# EAGLE board picoKey_230404 (EAGLE 9.6.2)
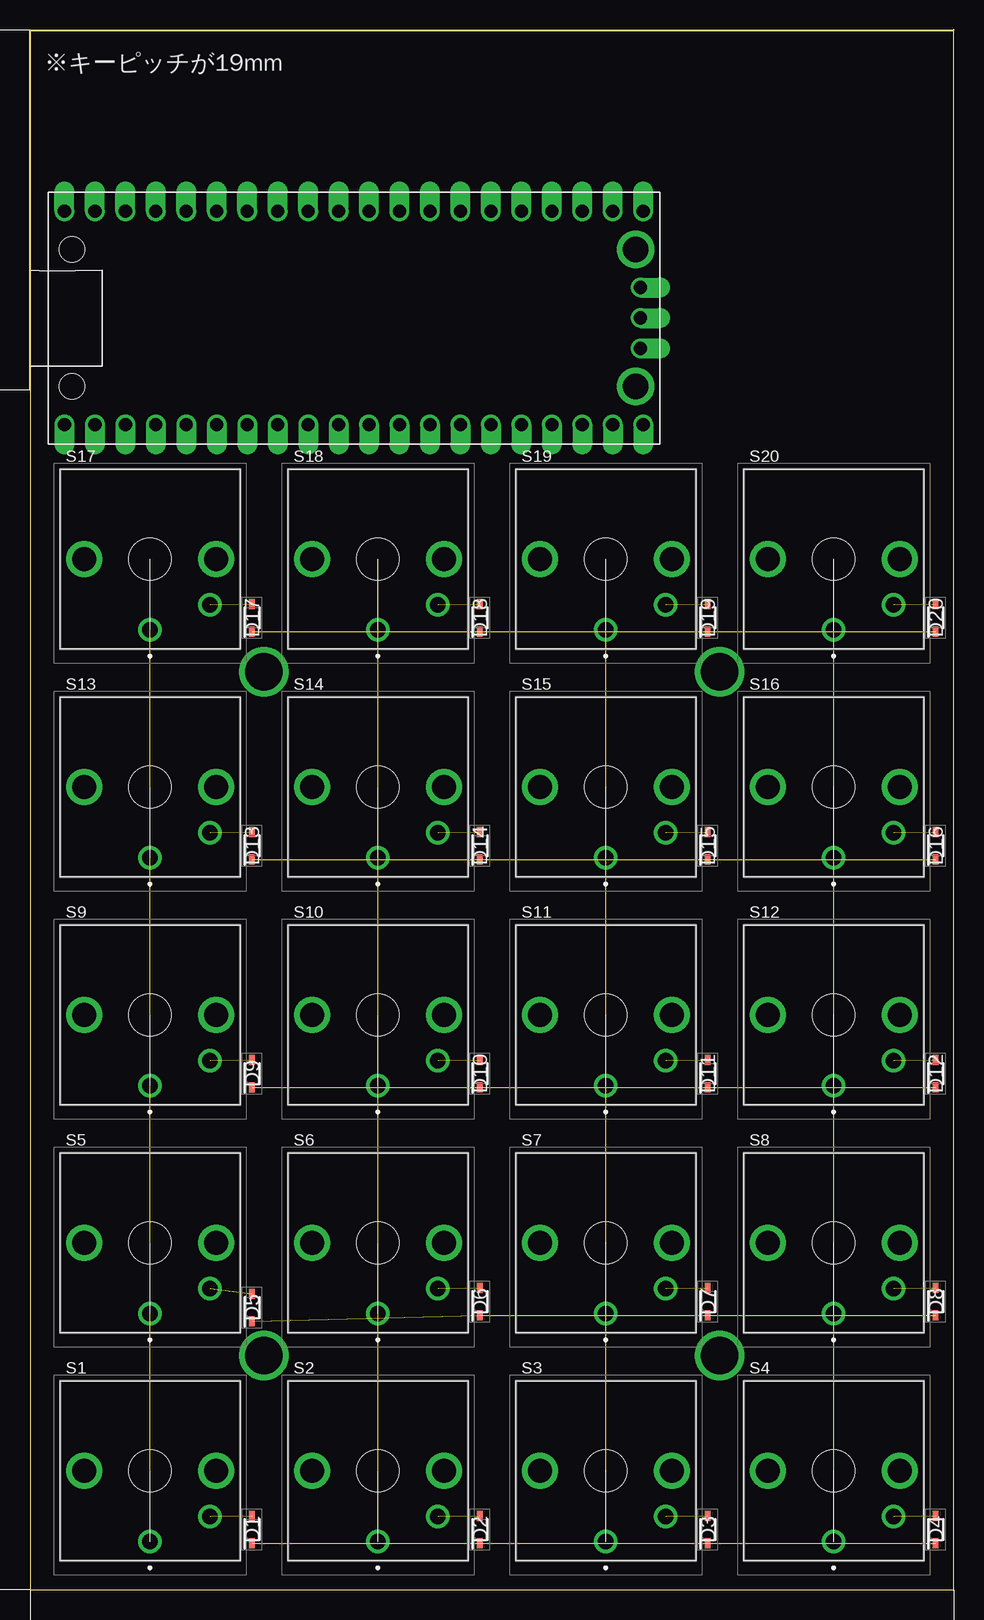
[diagram p0: board, top side]

Size 77 x 130 mm. Coordinates in mm from the lower left corner, seen from the top.
Outline: 0,0 77,0 77,130 0,130 0,100 0,0
Copper layers (1*16): Top 0.035mm / dielectric 1.6mm / Bottom 0.035mm
Design rules "Elecrow_2-layer_PCB_eagle_rule": minimum track width 6mil, minimum drill 12mil, track to track 6mil, track to pad 8mil, pad to pad 12mil, via to via 12mil, smd to smd 0mil, copper to edge 20mil, drill to drill 10mil, minimum pad ring 6mil, minimum via ring 6mil, stop-mask expansion 0mil, vias tented up to drill 100mil, thermal gap 10mil

## Footprints (pad centres in the part's own frame; a part is rotated, then mirrored left to right if it is on the bottom)
SODFL2512X90N = smd 0.82 x 0.42: 1 -1.15,0; 2 1.15,0
CPG135001D02 = drill 1.3 pad 1.95: 1 0,0; 2 5,2.1 | drill 2 pad 3: MH2 -5.5,5.9; MH3 5.5,5.9 | hole 3.5: 0,5.9
RASPBERRYPI_PICO_RPI_PICO_TH = drill 1.1 pad 1.6 offset: 3V3 8.89,13.97; 3V3_EN 8.89,16.51; ADC_VREF 8.89,11.43; AGND 8.89,6.35; GND@1 -8.89,19.05; GND@2 -8.89,6.35; GND@3 -8.89,-6.35; GND@4 -8.89,-19.05; GND@5 0,-23.9; GND@6 8.89,-19.05; GND@7 8.89,-6.35; GND@8 8.89,19.05; GP0 -8.89,24.13; GP1 -8.89,21.59; GP2 -8.89,16.51; GP3 -8.89,13.97; GP4 -8.89,11.43; GP5 -8.89,8.89; GP6 -8.89,3.81; GP7 -8.89,1.27; GP8 -8.89,-1.27; GP9 -8.89,-3.81; GP10 -8.89,-8.89; GP11 -8.89,-11.43; GP12 -8.89,-13.97; GP13 -8.89,-16.51; GP14 -8.89,-21.59; GP15 -8.89,-24.13; GP16 8.89,-24.13; GP17 8.89,-21.59; GP18 8.89,-16.51; GP19 8.89,-13.97; GP20 8.89,-11.43; GP21 8.89,-8.89; GP22 8.89,-3.81; GP26_A0 8.89,1.27; GP27_A1 8.89,3.81; GP28_A2 8.89,8.89; RUN 8.89,-1.27; SWCLK -2.54,-23.9; SWDIO 2.54,-23.9; VBUS 8.89,24.13; VSYS 8.89,21.59 | drill 2.1: TH1 -5.7,-23.5; TH2 5.7,-23.5 | hole 2.1: -5.7,23.5; 5.7,23.5

## Placement (x,y rotation side)
D1  1N4148WS  [SODFL2512X90N]  18.5,5 90 top
D2  1N4148WS  [SODFL2512X90N]  37.5,5 90 top
D3  1N4148WS  [SODFL2512X90N]  56.5,5 90 top
D4  1N4148WS  [SODFL2512X90N]  75.5,5 90 top
D5  1N4148WS  [SODFL2512X90N]  18.5,23.5 90 top
D6  1N4148WS  [SODFL2512X90N]  37.5,24 90 top
D7  1N4148WS  [SODFL2512X90N]  56.5,24 90 top
D8  1N4148WS  [SODFL2512X90N]  75.5,24 90 top
D9  1N4148WS  [SODFL2512X90N]  18.5,43 90 top
D10  1N4148WS  [SODFL2512X90N]  37.5,43 90 top
D11  1N4148WS  [SODFL2512X90N]  56.5,43 90 top
D12  1N4148WS  [SODFL2512X90N]  75.5,43 90 top
D13  1N4148WS  [SODFL2512X90N]  18.5,62 90 top
D14  1N4148WS  [SODFL2512X90N]  37.5,62 90 top
D15  1N4148WS  [SODFL2512X90N]  56.5,62 90 top
D16  1N4148WS  [SODFL2512X90N]  75.5,62 90 top
D17  1N4148WS  [SODFL2512X90N]  18.5,81 90 top
D18  1N4148WS  [SODFL2512X90N]  37.5,81 90 top
D19  1N4148WS  [SODFL2512X90N]  56.5,81 90 top
D20  1N4148WS  [SODFL2512X90N]  75.5,81 90 top
S1  CPG135001D02  [CPG135001D02]  10,4 0 top
S2  CPG135001D02  [CPG135001D02]  29,4 0 top
S3  CPG135001D02  [CPG135001D02]  48,4 0 top
S4  CPG135001D02  [CPG135001D02]  67,4 0 top
S5  CPG135001D02  [CPG135001D02]  10,23 0 top
S6  CPG135001D02  [CPG135001D02]  29,23 0 top
S7  CPG135001D02  [CPG135001D02]  48,23 0 top
S8  CPG135001D02  [CPG135001D02]  67,23 0 top
S9  CPG135001D02  [CPG135001D02]  10,42 0 top
S10  CPG135001D02  [CPG135001D02]  29,42 0 top
S11  CPG135001D02  [CPG135001D02]  48,42 0 top
S12  CPG135001D02  [CPG135001D02]  67,42 0 top
S13  CPG135001D02  [CPG135001D02]  10,61 0 top
S14  CPG135001D02  [CPG135001D02]  29,61 0 top
S15  CPG135001D02  [CPG135001D02]  48,61 0 top
S16  CPG135001D02  [CPG135001D02]  67,61 0 top
S17  CPG135001D02  [CPG135001D02]  10,80 0 top
S18  CPG135001D02  [CPG135001D02]  29,80 0 top
S19  CPG135001D02  [CPG135001D02]  48,80 0 top
S20  CPG135001D02  [CPG135001D02]  67,80 0 top
X1  [RASPBERRYPI_PICO_RPI_PICO_TH]  27,106 90 top

## Library data of the parts
D1-D20 = SamacSys_Parts; ARROW_PART_NUMBER: 1N4148WS; ARROW_PRICE-STOCK: https://www.arrow.com/en/products/1n4148ws/on-semiconductor?region=europe; DESCRIPTION: ON Semiconductor Switching Diode, 300mA 75V, 2-Pin SOD-323 1N4148WS; HEIGHT: 0.9mm; MANUFACTURER_NAME: onsemi; MANUFACTURER_PART_NUMBER: 1N4148WS; MOUSER_PART_NUMBER: 512-1N4148WS; MOUSER_PRICE-STOCK: https://www.mouser.co.uk/ProductDetail/onsemi-Fairchild/1N4148WS?qs=2%2FYqgE%252BHg%252BKBrKZlAsMLhw%3D%3D
S1-S20 = picoKey; DESCRIPTION: Through Hole Tactile Switches RoHS; HEIGHT: 8mm; MANUFACTURER_NAME: Kailh; MANUFACTURER_PART_NUMBER: CPG135001D02
X1 = picoKey

## Nets
COL1: S1.1 S5.1 S9.1 S13.1 S17.1
COL2: S2.1 S6.1 S10.1 S14.1 S18.1
COL3: S3.1 S7.1 S11.1 S15.1 S19.1
COL4: S4.1 S8.1 S12.1 S16.1 S20.1
N$5: D1.2 S1.2
N$6: D2.2 S2.2
N$7: D3.2 S3.2
N$8: D4.2 S4.2
N$9: D5.2 S5.2
N$10: D6.2 S6.2
N$11: D7.2 S7.2
N$12: D8.2 S8.2
N$13: D9.2 S9.2
N$14: D10.2 S10.2
N$15: D11.2 S11.2
N$16: D12.2 S12.2
N$17: D13.2 S13.2
N$18: D14.2 S14.2
N$19: D15.2 S15.2
N$20: D16.2 S16.2
N$21: D17.2 S17.2
N$22: D18.2 S18.2
N$24: D20.2 S20.2
N$25: D19.2 S19.2
ROW1: D1.1 D2.1 D3.1 D4.1
ROW2: D5.1 D6.1 D7.1 D8.1
ROW3: D9.1 D10.1 D11.1 D12.1
ROW4: D13.1 D14.1 D15.1 D16.1
ROW5: D17.1 D18.1 D19.1 D20.1

## Tracks (layer width: path | path; a pad name or v marks a point on that pad's centre or on a via)
COL1  (4 unrouted)
COL2  (4 unrouted)
COL3  (4 unrouted)
COL4  (4 unrouted)
N$1  (via drill 3.1)
  other vias: 19.5,19.5
N$2  (via drill 3.1)
  other vias: 57.5,19.5
N$3  (via drill 3.1)
  other vias: 19.5,76.5
N$4  (via drill 3.1)
  other vias: 57.5,76.5
N$5  (1 unrouted)
N$6  (1 unrouted)
N$7  (1 unrouted)
N$8  (1 unrouted)
N$9  (1 unrouted)
N$10  (1 unrouted)
N$11  (1 unrouted)
N$12  (1 unrouted)
N$13  (1 unrouted)
N$14  (1 unrouted)
N$15  (1 unrouted)
N$16  (1 unrouted)
N$17  (1 unrouted)
N$18  (1 unrouted)
N$19  (1 unrouted)
N$20  (1 unrouted)
N$21  (1 unrouted)
N$22  (1 unrouted)
N$24  (1 unrouted)
N$25  (1 unrouted)
ROW1  (3 unrouted)
ROW2  (3 unrouted)
ROW3  (3 unrouted)
ROW4  (3 unrouted)
ROW5  (3 unrouted)

## Text on the board
tPlace: ※キーピッチが19mm